# EAGLE board NeoJointV2A-180-20mm (EAGLE 6.6.0)
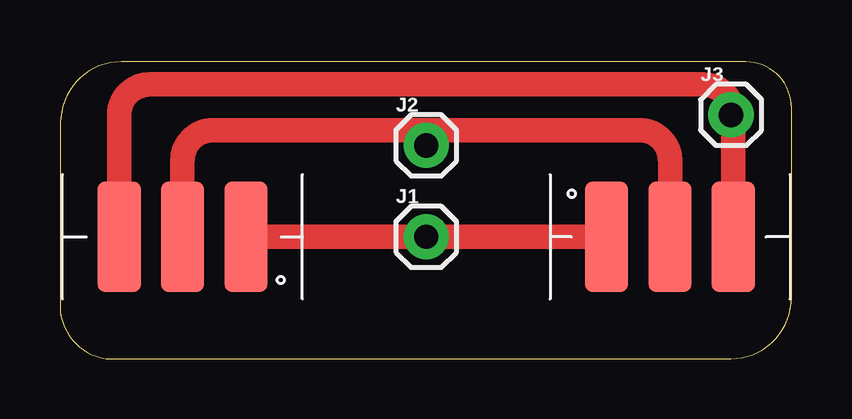
[diagram p0: board, top side]

Size 30.48 x 12.37 mm. Coordinates in mm from the lower left corner, seen from the top.
Outline: 0.02,9.83 0.02,2.54 arc90 1.93,0 27.94,0 arc90 30.48,2.54 30.48,10.46 arc90 28.58,12.37 2.56,12.37 arc90 0.02,9.83
Copper layers (1*16): Top 0.035mm / dielectric 1.5mm / Bottom 0.035mm
Design rules "OthermillDRC_30_deg_v2": minimum track width 6mil, minimum drill 0.8mm, track to track 6mil, track to pad 6mil, pad to pad 6mil, via to via 6mil, smd to smd 0mil, copper to edge 0mil, drill to drill 6mil, minimum pad ring 10mil, minimum via ring 10mil, stop-mask expansion 1mil, vias tented up to drill 30mil, thermal gap 6mil

## Footprints (pad centres in the part's own frame; a part is rotated, then mirrored left to right if it is on the bottom)
1X01 = drill 1.016 pad 1.88: 1 0,0
LEDSTRIP-3P = smd 4.6 x 1.8: A 0,-2.65; B 0,0; C 0,2.63

## Placement (x,y rotation side)
J1  [1X01]  15.26,5.08 0 top
J2  [1X01]  15.26,8.89 0 top
J3  [1X01]  27.96,10.16 0 top
U$1  LED_STRIP_3P  [LEDSTRIP-3P]  5.1,5.08 90 top
U$2  LED_STRIP_3P  [LEDSTRIP-3P]  25.42,5.08 270 top

## Library data of the parts
J1-J3 = SparkFun-Connectors
U$1 U$2 = NeoJoints

## Nets
N$1: J1.1 U$1.A U$2.A
N$2: J2.1 U$1.B U$2.B
N$3: J3.1 U$1.C U$2.C

## Tracks (layer width: path | path; a pad name or v marks a point on that pad's centre or on a via)
N$1
  Top 1.016: U$1.A J1.1 | J1.1 16.53,5.08 | 16.53,5.08 U$2.A | J1.1 16.53,5.08
N$2
  Top 1.016: U$1.B 5.1,8.26 arc-90 6.37,9.53 15.26,9.53 | 15.26,9.53 24.15,9.53 arc-90 25.42,8.26 U$2.B | J2.1 15.26,9.53
N$3
  Top 1.016: U$1.C 2.47,10.16 arc-90 3.74,11.43 7.64,11.43 26.69,11.43 26.78,11.43 arc-90 28.05,10.16 28.05,8.89 | 28.05,8.89 U$2.C | J3.1 arc-90 28.05,10.07 28.05,8.89